# EAGLE board CT_schematic (EAGLE 7.6.0)

Size 100 x 80 mm. Coordinates in mm from the lower left corner, seen from the top.
Outline: 0,0 100,0 100,80 0,80 0,0
Copper layers (1*16): Top 0.035mm / dielectric 1.5mm / Bottom 0.035mm
Design rules "default": minimum track width 10mil, minimum drill 24mil, track to track 8mil, track to pad 8mil, pad to pad 8mil, via to via 8mil, smd to smd 8mil, copper to edge 40mil, drill to drill 8mil, minimum pad ring 10mil, minimum via ring 8mil, stop-mask expansion 4mil, vias tented up to drill 0mil, thermal gap 10mil

## Footprints (pad centres in the part's own frame; a part is rotated, then mirrored left to right if it is on the bottom)
C0603 = smd 0.8 x 0.8: 1 -0.762,0; 2 0.762,0
C0402 = smd 0.5 x 0.5: 1 -0.508,0; 2 0.508,0
C1210 = smd 1.2 x 2.5: 1 -1.524,0; 2 1.524,0
C1206 = smd 1.3 x 1.6: 1 -1.524,0; 2 1.524,0
L0603 = smd 0.8 x 0.8: 1 -0.762,0; 2 0.762,0
R0603 = smd 0.8 x 0.8: 1 -0.762,0; 2 0.762,0
LQFP32 = smd 0.54 x 0.85: 1 -2.8,-4.275; 2 -2,-4.275; 3 -1.2,-4.275; 4 -0.4,-4.275; 5 0.4,-4.275; 6 1.19,-4.275; 7 1.99,-4.275; 8 2.79,-4.275; 17 2.8,4.275; 18 2,4.275; 19 1.2,4.275; 20 0.4,4.275; 21 -0.4,4.275; 22 -1.2,4.275; 23 -2,4.275; 24 -2.8,4.275 | smd 0.85 x 0.54: 9 4.275,-2.8; 10 4.275,-2; 11 4.275,-1.2; 12 4.275,-0.4; 13 4.275,0.4; 14 4.275,1.2; 15 4.275,2; 16 4.275,2.8; 25 -4.275,2.8; 26 -4.275,2; 27 -4.275,1.2; 28 -4.275,0.4; 29 -4.275,-0.4; 30 -4.275,-1.2; 31 -4.275,-2; 32 -4.275,-2.8
SOIC-8 = smd 1.6 x 0.6: 1 -2.7,1.905 | smd 1.55 x 0.6: 2 -2.7,0.635; 3 -2.7,-0.635; 4 -2.7,-1.905; 5 2.7,-1.905; 6 2.7,-0.635; 7 2.7,0.635; 8 2.7,1.905
TSSOP20-I = smd 0.4 x 1.35: 1 -2.925,-2.875; 2 -2.275,-2.875; 3 -1.625,-2.875; 4 -0.975,-2.875; 5 -0.325,-2.875; 6 0.325,-2.875; 7 0.975,-2.875; 8 1.625,-2.875; 9 2.275,-2.875; 10 2.925,-2.875; 11 2.925,2.875; 12 2.275,2.875; 13 1.625,2.875; 14 0.975,2.875; 15 0.325,2.875; 16 -0.325,2.875; 17 -0.975,2.875; 18 -1.625,2.875; 19 -2.275,2.875; 20 -2.925,2.875
182-009-MALE = drill 1.194 pad 1.524 octagon: 1 -5.537,10.923; 2 -2.769,10.923; 3 0,10.923; 4 2.769,10.923; 5 5.537,10.923; 6 -4.153,8.08; 7 -1.384,8.08; 8 1.384,8.08; 9 4.153,8.08 | hole 3.048: -12.446,9.501; 12.446,9.501
HTSS-105-01-G-D = drill 1 pad 1.8 square: 1 0,0 | drill 1 pad 1.8: 2 0,2.54; 3 2.54,0; 4 2.54,2.54; 5 5.08,0; 6 5.08,2.54; 7 7.62,0; 8 7.62,2.54; 9 10.16,0; 10 10.16,2.54
FCI_10118193-0001LF = smd 0.4 x 1.35: 1 -1.3,2.675; 2 -0.65,2.675; 3 0,2.675; 4 0.65,2.675; 5 1.3,2.675 | smd 1.6 x 1.4: 6 -3.2,2.45; 7 3.2,2.45 | smd 1.9 x 1.9: 8 -1.2,0; 9 1.2,0 | hole 0.5: -3.3,0; 3.3,0
SOT143B = smd 1 x 0.7: 1 -0.75,-1 | smd 0.6 x 0.7: 2 0.95,-1; 3 0.95,1; 4 -0.95,1
ABS07-32.768KHZ-7-T = smd 1.1 x 2.4: 1 -2.5,0; 2 0,0
SOIC-8_EP = smd 1.6 x 0.533: 1 -2.921,1.905; 2 -2.921,0.635; 3 -2.921,-0.635; 4 -2.921,-1.905; 5 2.921,-1.905; 6 2.921,-0.635; 7 2.921,0.635; 8 2.921,1.905 | smd 2.54 x 3.302: EPAD 0,0 | drill 0.406 pad 0.406: P$1 -0.508,0.635; P$2 0.381,0.635; P$3 -0.508,-0.635; P$4 0.381,-0.635
DFN8_2X3MC = smd 0.813 x 0.305: 1 -1.398,0.75; 2 -1.398,0.25; 3 -1.398,-0.25; 4 -1.398,-0.75; 5 1.398,-0.75; 6 1.398,-0.25; 7 1.398,0.25; 8 1.398,0.75 | smd 1.753 x 1.549: 9 0,0
JST-2-SMD = smd 1 x 4.6: 1 -1,-3.7; 2 1,-3.7 | smd 1.6 x 3.4: NC1 -3.4,1.5; NC2 3.4,1.5
SON-6 = smd 0.55 x 0.3: 1 -0.355,0.5 | smd 0.52 x 0.3: 2 -0.37,0; 3 -0.37,-0.5; 4 0.37,-0.5; 5 0.37,0; 6 0.37,0.5
SW_4-1437565-2 = smd 1.4 x 2.1: 1 -2.23,4.55; 2 -2.23,-4.55; 3 2.23,4.55; 4 2.23,-4.55
LGM67K-G1J2-24-Z = smd 0.8 x 1.4: A -2,0; C 0,0
NC7SZ125M5X = smd 1.3 x 0.7: 1 -1.3,0.95; 2 -1.3,0; 3 -1.3,-0.95; 4 1.3,-0.95; 5 1.3,0.95

## Placement (x,y rotation side)
C1  1e-07  [C0603]  -43.18,60.96 0 top  (outside the outline)
C2  1e-07  [C0603]  -46.99,60.96 0 top  (outside the outline)
C3  1e-07  [C0603]  -50.8,60.96 0 top  (outside the outline)
C4  1e-07  [C0603]  -54.61,60.96 0 top  (outside the outline)
C5  4.7e-06  [C0603]  -39.37,60.96 0 top  (outside the outline)
C6  1e-08  [C0603]  -58.42,60.96 0 top  (outside the outline)
C7  1e-06  [C0603]  -62.23,60.96 0 top  (outside the outline)
C8  1e-11  [C0402]  -34.29,66.04 0 top  (outside the outline)
C9  1e-11  [C0402]  -38.1,66.04 0 top  (outside the outline)
C10  1e-08  [C0402]  -41.91,66.04 0 top  (outside the outline)
C11  1e-07  [C0402]  -45.72,66.04 0 top  (outside the outline)
C12  1e-07  [C0402]  -49.53,66.04 0 top  (outside the outline)
C13  1e-07  [C0402]  -53.34,66.04 0 top  (outside the outline)
C14  1e-07  [C0402]  -57.15,66.04 0 top  (outside the outline)
C15  1e-07  [C0402]  -60.96,66.04 0 top  (outside the outline)
C16  1e-07  [C0402]  -64.77,66.04 0 top  (outside the outline)
C17  1e-07  [C0402]  -68.58,66.04 0 top  (outside the outline)
C18  1e-07  [C0402]  -72.39,66.04 0 top  (outside the outline)
C19  1e-07  [C0402]  -15.24,71.12 0 top  (outside the outline)
C20  1e-07  [C0402]  -19.05,71.12 0 top  (outside the outline)
C21  1e-07  [C0402]  -22.86,71.12 0 top  (outside the outline)
C22  1e-07  [C0402]  -26.67,71.12 0 top  (outside the outline)
C23  1e-05  [C1210]  -57.15,48.26 0 top  (outside the outline)
C24  1e-05  [C1210]  -63.5,48.26 0 top  (outside the outline)
C25  1e-05  [C1210]  -69.85,48.26 0 top  (outside the outline)
C26  1e-05  [C1210]  -16.51,55.88 0 top  (outside the outline)
C27  1e-07  [C0402]  -30.48,71.12 0 top  (outside the outline)
C28  1e-05  [C1206]  -22.86,55.88 0 top  (outside the outline)
C29  1e-05  [C1206]  -29.21,55.88 0 top  (outside the outline)
C30  1e-08  [C0402]  -34.29,71.12 0 top  (outside the outline)
F1  240.0  [L0603]  -66.04,60.96 0 top  (outside the outline)
R1  10000.0  [R0603]  -59.69,54.61 0 top  (outside the outline)
R2  1000.0  [R0603]  -69.85,60.96 0 top  (outside the outline)
R3  1600.5  [R0603]  -15.24,66.04 0 top  (outside the outline)
R4  4700.0  [R0603]  -19.05,66.04 0 top  (outside the outline)
R5  10000.0  [R0603]  -64.77,54.61 0 top  (outside the outline)
R6  10000.0  [R0603]  -69.85,54.61 0 top  (outside the outline)
R7  10000.0  [R0603]  -15.24,60.96 0 top  (outside the outline)
R8  10000.0  [R0603]  -20.32,60.96 0 top  (outside the outline)
R9  4031.5447154472  [R0603]  -44.45,54.61 0 top  (outside the outline)
R10  2200.0  [R0603]  -22.86,66.04 0 top  (outside the outline)
R11  10000.0  [R0603]  -25.4,60.96 0 top  (outside the outline)
R12  10000.0  [R0603]  -30.48,60.96 0 top  (outside the outline)
R13  9100.0  [R0603]  -26.67,66.04 0 top  (outside the outline)
R14  680000.0  [R0603]  -49.53,54.61 0 top  (outside the outline)
R15  120000.0  [R0603]  -54.61,54.61 0 top  (outside the outline)
R16  2000.0  [R0603]  -30.48,66.04 0 top  (outside the outline)
R17  10000.0  [R0603]  -35.56,60.96 0 top  (outside the outline)
U1  STM32L082KZT6  [LQFP32]  -63.5,7.62 0 top  (outside the outline)
U2  AT25020B-SSHL-T  [SOIC-8]  -58.42,39.37 0 top  (outside the outline)
U3  SP3203ECY-L/TR  [TSSOP20-I]  -43.18,27.94 0 top  (outside the outline)
U4  182-009-113R531  [182-009-MALE]  -36.83,6.35 0 top  (outside the outline)
U5  SP3203ECY-L/TR  [TSSOP20-I]  -58.42,27.94 0 top  (outside the outline)
U6  HTSS-105-01-G-D  [HTSS-105-01-G-D]  -43.18,38.1 0 top  (outside the outline)
U7  10118193-0001LF  [FCI_10118193-0001LF]  -68.58,38.1 0 top  (outside the outline)
U8  prtr5v0u2ax  [SOT143B]  -46.99,71.12 0 top  (outside the outline)
U9  ABS07-32.768KHZ-7-T  [ABS07-32.768KHZ-7-T]  -27.94,48.26 0 top  (outside the outline)
U10  MIC5234YME  [SOIC-8_EP]  -36.83,48.26 0 top  (outside the outline)
U11  MCP73831T-2ACI/MC  [DFN8_2X3MC]  -57.15,69.85 0 top  (outside the outline)
U12  S2B-PH-SM4-TB(LF)(SN)  [JST-2-SMD]  -22.86,40.64 0 top  (outside the outline)
U13  TPS3895ADRYR  [SON-6]  -50.8,69.85 0 top  (outside the outline)
U14  4-1437565-2  [SW_4-1437565-2]  -27.94,27.94 0 top  (outside the outline)
U15  Q65110A2395  [LGM67K-G1J2-24-Z]  -45.72,48.26 0 top  (outside the outline)
U16  nc7sz125m5x  [NC7SZ125M5X]  -34.29,54.61 0 top  (outside the outline)

## Library data of the parts
C1-C30 F1 R1-R17 U1-U16 = circuit_tree

## Nets
CLK_CRYSTAL_U1_2: C8.1 U1.2 U9.1
CLK_CRYSTAL_U1_3: C9.1 U1.3 U9.2
GND: C1.2 C2.2 C3.2 C4.2 C5.2 C6.2 C7.2 C8.2 C9.2 C10.2 C11.2 C12.2 C15.2 C16.2 C17.2 C18.2 C21.2 C22.2 C23.2 C24.2 C25.2 C26.2 C27.2 C28.2 C29.2 C30.2 R2.2 R5.2 R10.2 R13.2 R15.2 R16.2 U1.16 U1.32 U2.4 U3.18 U4.5 U5.18 U6.9 U7.5 U7.6 U7.7 U7.8 U7.9 U8.1 U10.7 U10.EPAD U11.6 U11.9 U12.2 U13.2 U15.C U16.1 U16.3
INPUT_USBPOWER_5V: C28.1 R17.2 U7.1 U8.4 U11.1 U11.2
NET_U1_4: R4.1 U1.4 U16.4
NET_U1_5: C6.1 C7.1 F1.1 U1.5
NET_U1_29: R3.1 U1.29 U15.A
NET_U1_30: R1.1 U1.30 U14.3 U14.4
NET_U1_31: R5.1 U1.31
NET_U2_3: R6.1 U2.3
NET_U2_7: R8.1 U2.7
NET_U3_1: C13.1 U3.1
NET_U3_2: C15.1 U3.2
NET_U3_3: C13.2 U3.3
NET_U3_4: C14.1 U3.4
NET_U3_5: C14.2 U3.5
NET_U3_6: C16.1 U3.6
NET_U3_20: U3.20
NET_U4_2: U3.14 U4.2
NET_U4_3: U3.17 U4.3
NET_U4_7: U3.13 U4.7
NET_U4_8: U3.16 U4.8
NET_U5_1: C19.1 U5.1
NET_U5_2: C21.1 U5.2
NET_U5_3: C19.2 U5.3
NET_U5_4: C20.1 U5.4
NET_U5_5: C20.2 U5.5
NET_U5_6: C22.1 U5.6
NET_U5_20: U5.20
NET_U6_3: U5.14 U6.3
NET_U6_4: U5.13 U6.4
NET_U6_5: U5.17 U6.5
NET_U6_6: U5.16 U6.6
NET_U10_4: R9.2 R10.1 U10.4
NET_U11_5: R17.1 U11.5
NET_U11_8: R16.1 U11.8
NET_U13_1: R12.1 R13.1 U13.1
NET_U13_3: R14.2 R15.1 U13.3
NET_U13_4: R11.1 U13.4 U16.2
NET_U14_1: R2.1 U14.1 U14.2
PROC_LPUART1_CTS: U1.12 U3.8
PROC_LPUART1_RTS: U1.15 U3.10
PROC_LPUART1_RX: U1.9 U3.11
PROC_LPUART1_TX: U1.8 U3.7
PROC_SPI1_MISO: U1.27 U2.2
PROC_SPI1_MOSI: U1.13 U2.5
PROC_SPI1_NSS: R7.1 U1.10 U2.1
PROC_SPI1_SCK: U1.11 U2.6
PROC_USART2_CTS: U1.6 U5.8
PROC_USART2_RTS: U1.7 U5.10
PROC_USART2_RX: U1.25 U5.11
PROC_USART2_TX: U1.24 U5.7
PROC_USB_DM: U1.21 U7.2 U8.3
PROC_USB_DP: U1.22 U7.3 U8.2
VCC_S1_3V7: C23.1 C24.1 C29.1 U10.5 U10.8 U11.3 U11.4 U12.1
VCC_TIER1_3V3: C1.1 C2.1 C3.1 C4.1 C5.1 C10.1 C11.1 C12.1 C17.1 C18.1 C25.1 C26.1 C27.1 C30.1 F1.2 R1.2 R3.2 R4.2 R6.2 R7.2 R8.2 R9.1 R11.2 R12.2 R14.1 U1.1 U1.17 U2.8 U3.12 U3.19 U5.12 U5.19 U10.1 U13.6 U16.5

## Tracks (layer width: path | path; a pad name or v marks a point on that pad's centre or on a via)
CLK_CRYSTAL_U1_2  (2 unrouted)
CLK_CRYSTAL_U1_3  (2 unrouted)
GND  (53 unrouted)
INPUT_USBPOWER_5V  (5 unrouted)
NET_U1_4  (2 unrouted)
NET_U1_5  (3 unrouted)
NET_U1_29  (2 unrouted)
NET_U1_30  (3 unrouted)
NET_U1_31  (1 unrouted)
NET_U2_3  (1 unrouted)
NET_U2_7  (1 unrouted)
NET_U3_1  (1 unrouted)
NET_U3_2  (1 unrouted)
NET_U3_3  (1 unrouted)
NET_U3_4  (1 unrouted)
NET_U3_5  (1 unrouted)
NET_U3_6  (1 unrouted)
NET_U4_2  (1 unrouted)
NET_U4_3  (1 unrouted)
NET_U4_7  (1 unrouted)
NET_U4_8  (1 unrouted)
NET_U5_1  (1 unrouted)
NET_U5_2  (1 unrouted)
NET_U5_3  (1 unrouted)
NET_U5_4  (1 unrouted)
NET_U5_5  (1 unrouted)
NET_U5_6  (1 unrouted)
NET_U6_3  (1 unrouted)
NET_U6_4  (1 unrouted)
NET_U6_5  (1 unrouted)
NET_U6_6  (1 unrouted)
NET_U10_4  (2 unrouted)
NET_U11_5  (1 unrouted)
NET_U11_8  (1 unrouted)
NET_U13_1  (2 unrouted)
NET_U13_3  (2 unrouted)
NET_U13_4  (2 unrouted)
NET_U14_1  (2 unrouted)
PROC_LPUART1_CTS  (1 unrouted)
PROC_LPUART1_RTS  (1 unrouted)
PROC_LPUART1_RX  (1 unrouted)
PROC_LPUART1_TX  (1 unrouted)
PROC_SPI1_MISO  (1 unrouted)
PROC_SPI1_MOSI  (1 unrouted)
PROC_SPI1_NSS  (2 unrouted)
PROC_SPI1_SCK  (1 unrouted)
PROC_USART2_CTS  (1 unrouted)
PROC_USART2_RTS  (1 unrouted)
PROC_USART2_RX  (1 unrouted)
PROC_USART2_TX  (1 unrouted)
PROC_USB_DM  (2 unrouted)
PROC_USB_DP  (2 unrouted)
VCC_S1_3V7  (7 unrouted)
VCC_TIER1_3V3  (34 unrouted)